# Altium PCB ESP32 with USBC.PcbDoc
Units mil, origin at the board's own origin, x right, y up, seen from the top; angles counter-clockwise.
Board outline 2700 x 1000 mil, 4 copper layers (L1, L2, L3, L4), stack 61.583 mil thick; 65 components, 77 nets, 323 pads, 159 vias.
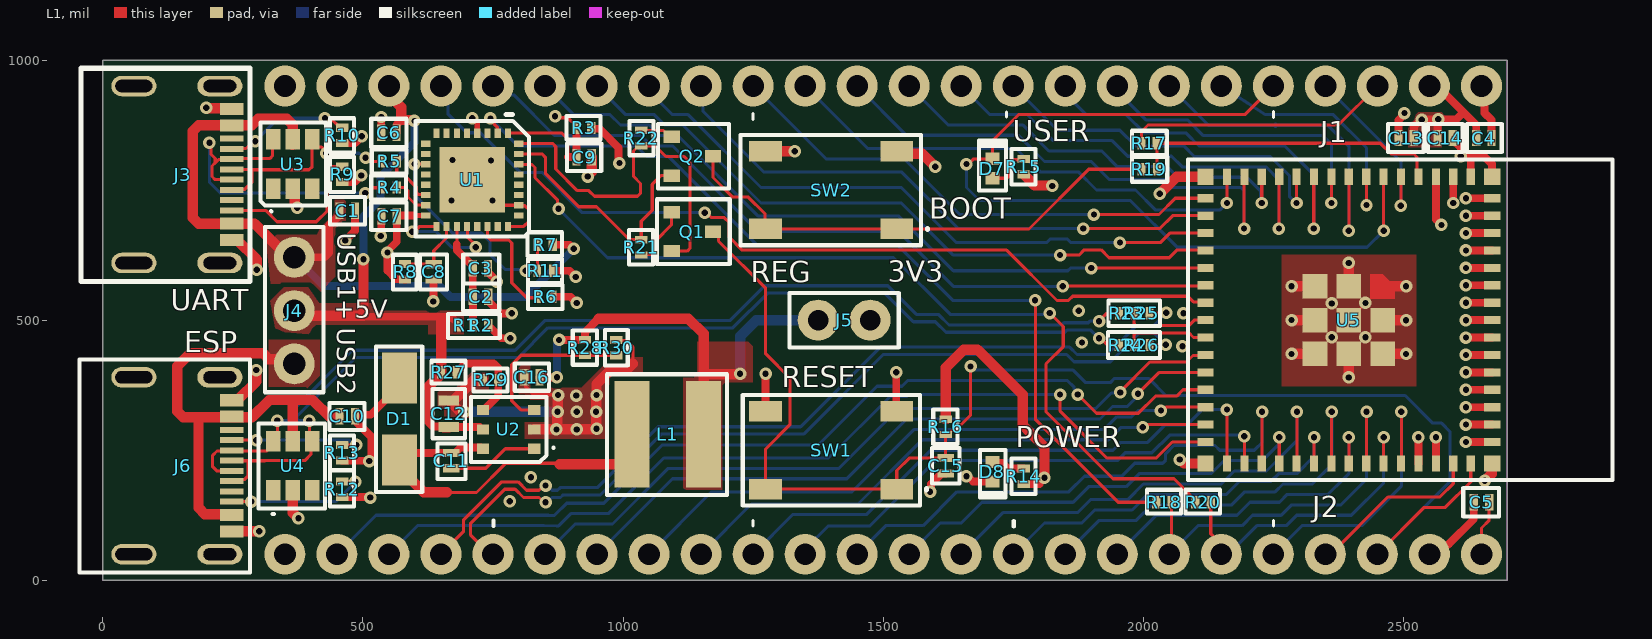
[diagram p0: L1 view]
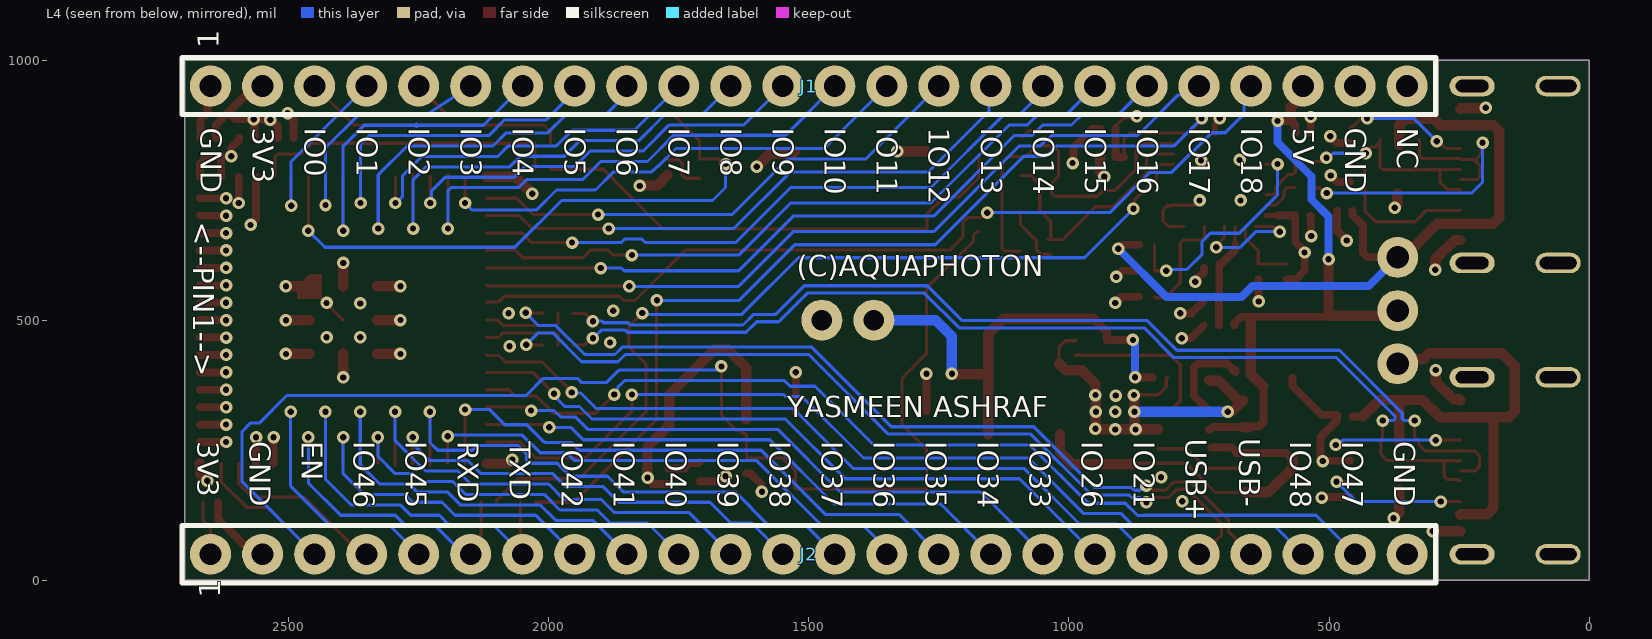
[diagram p1: L4 view, seen from below]
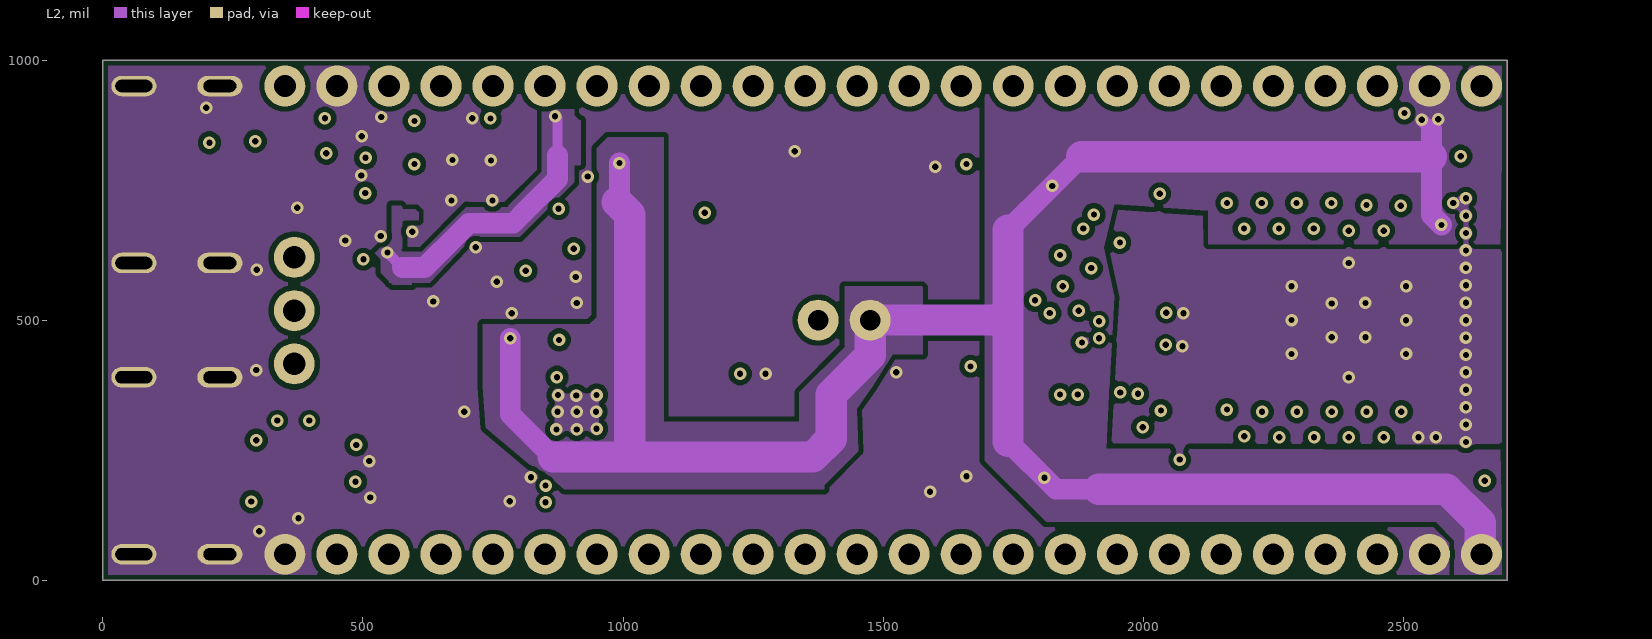
[diagram p2: L2]
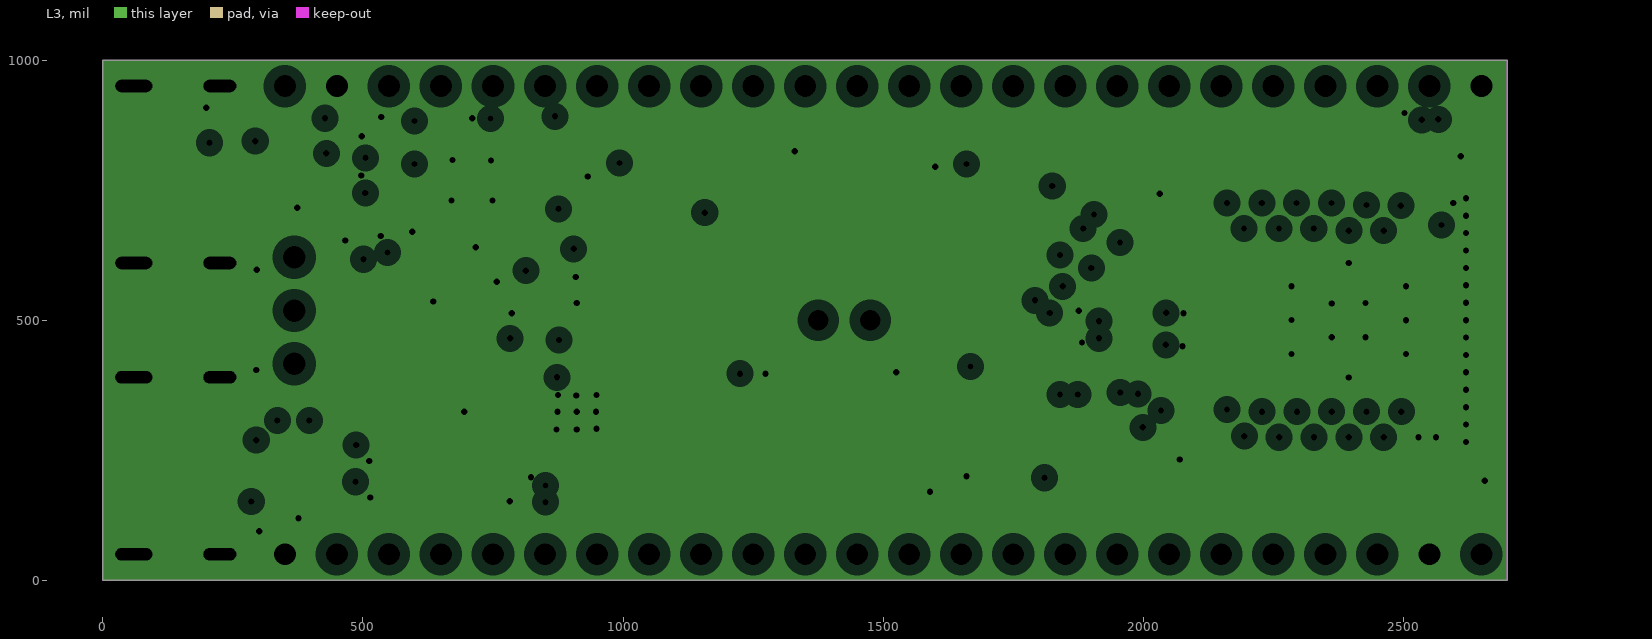
[diagram p3: L3, clearances drawn from the general rule]

## Layer stack, top to bottom
Top Solder: solder mask 0.4, Solder Resist, Dk 3.5
L1: signal copper 1.378
Dielectric 2: prepreg 3.9134, PP-006, Dk 4.1
L2: signal copper 0.5984
Dielectric 1: dielectric 49.8031, FR-4, Dk 4.8
L3: plane copper 0.5984, net GND
Dielectric 3: prepreg 3.9134, PP-006, Dk 4.1
L4: signal copper 1.378
Bottom Solder: solder mask 0.4, Solder Resist, Dk 3.5

## Board outline
0,0 0,1000 2700,1000 2700,0

## Design rules (kind name [scope] priority, off if disabled: settings)
Clearance SMALLER [(WithinRoom('FTDI')or WithinRoom('USBC1')or WithinRoom('USBC2'))And (Layer= 'L1')] p1: gap=6 ignorepadtopadclearanceinfootprint=FALSE
Clearance "DIFF90 Clearance" [InDifferentialPairClass('DIFF90')] p2: gap=6 ignorepadtopadclearanceinfootprint=FALSE
Clearance [All] p3: gap=8 ignorepadtopadclearanceinfootprint=FALSE
ComponentClearance R1R2 [InComponent('R1') vs InComponent('R2')] p1: gap=0 collisioncheckmode=3 verticalgap=0 showdistances=FALSE
ComponentClearance R24R26 [InComponent('R24') vs InComponent('R26')] p2: gap=0 collisioncheckmode=3 verticalgap=0 showdistances=FALSE
ComponentClearance R23R25 [InComponent('R23') vs InComponent('R25')] p3: gap=0 collisioncheckmode=3 verticalgap=0 showdistances=FALSE
ComponentClearance [All] p4: gap=10 collisioncheckmode=3 verticalgap=10 showdistances=FALSE
DiffPairsRouting DIFF90 [InDifferentialPairClass('DIFF90')] p1: maxlimit=8.1 minlimit=8 mostfreqgap=8 toplayer_minwidth=6.03 toplayer_maxwidth=6.23 toplayer_prefwidth=6.03 midlayer1_minwidth=5.1 midlayer1_maxwidth=5.2 midlayer1_prefwidth=5.1 bottomlayer_minwidth=6.03 bottomlayer_maxwidth=6.23 bottomlayer_prefwidth=6.03 maxuncoupledlength=500
MinimumSolderMaskSliver [All] p1: minsoldermaskwidth=2.95
PlaneClearance [All] p1: clearance=20
PlaneConnect [All] p1: pad.planeconnectstyle=Relief pad.reliefexpansion=20 pad.reliefentries=4 pad.reliefconductorwidth=20 pad.reliefairgap=10 via.planeconnectstyle=Direct via.reliefexpansion=20 via.reliefentries=4 via.reliefconductorwidth=10 via.reliefairgap=10
PolygonConnect [All] p1: connectstyle=Direct reliefconductorwidth=10 reliefentries=4 polygonreliefangle="90 Angle" airgapwidth=10
RoomDefinition USBC1 [False vs False] p1: confinementstyle=ConfineIn formatcopy=TRUE lockcomponents=FALSE outline 219,922 303,922 303,637 219,637
RoomDefinition USBC2 [False vs False] p2: confinementstyle=ConfineIn formatcopy=TRUE lockcomponents=FALSE outline 209,363 312,363 312,81 209,81
RoomDefinition FTDI [False vs False] p3: confinementstyle=ConfineIn formatcopy=TRUE lockcomponents=FALSE outline 606,872 813,872 813,668 606,668
RoutingVias [All] p1: holewidth=12 width=24 viastyle="Through Hole" minholewidth=12 minwidth=24 maxholewidth=12 maxwidth=24
SilkToSilkClearance [All] p1: silktosilkclearance=6
SilkToSolderMaskClearance [IsPad] p1: minsilkscreentomaskgap=5.91 clearancetoexposedcopper=TRUE
SolderMaskExpansion [All] p1: expansion=2 istentingtop=FALSE
SupplyNets "Schematic Supply Nets_5" [InNet('GND')] p1: voltage=0.000
SupplyNets "Schematic Supply Nets_4" [InNet('+5V_VBUS1')] p2: voltage=0.000
SupplyNets "Schematic Supply Nets_3" [InNet('+5V_VBUS2')] p3: voltage=0.000
SupplyNets "Schematic Supply Nets_2" [InNet('+5V')] p4: voltage=0.000
SupplyNets "Schematic Supply Nets_1" [InNet('+3V3_REG')] p5: voltage=0.000
SupplyNets "Schematic Supply Nets" [InNet('+3V3')] p6: voltage=0.000
Width [All] p1: maxlimit=100 minlimit=6 preferedwidth=10 minimp=50.000000 maximp=50.000000 favimp=50.000000
23 further rules are at their usual default settings.

## Classes and differential pairs
differential pair class DIFF90: CON2_USB CON_ESP_USB ESP_USB
differential pair FTDI_USB: +FTDI_USB_P -FTDI_USB_N
differential pair ESP_USB: +ESP_USB_P -ESP_USB_N
differential pair CON_ESP_USB: +CON_ESP_USB_P -CON_ESP_USB_N
differential pair CON2_USB: +CON2_USB_P -CON2_USB_N
differential pair CON1_USB: +CON1_USB_P -CON1_USB_N

## Components (designator, comment, footprint, x,y, rotation, side; value= is the part's Value field where it differs from the comment)
C1 "100nF, 50V" CAPACITOR 470,710 r180 top
C2 "4u7, 16V" CAPACITOR 726,544.76 r180 top
C3 "100nF, 50V" CAPACITOR 725.76,600 r180 top
C4 "100nF, 50V" CAPACITOR 2654.76,850 r180 top
C5 "100nF, 50V" CAPACITOR 2650,150 r0 top
C6 "100nF, 50V" CAPACITOR 550,860 r0 top
C7 "100nF, 50V" CAPACITOR 550.24,700 r0 top
C8 "100nF, 50V" CAPACITOR 636,592.76 r90 top
C9 "100nF, 50V" CAPACITOR 925.14,813.45 r180 top
C10 "100nF, 50V" CAPACITOR 470,315 r180 top
C11 "100nF, 50V" CAPACITOR 670,230 r270 top
C12 "10uF,25V" CL10A106MA8NRNC 665,320 r270 top
C13 "10uF, 10V" CAPACITOR 2505,850 r0 top
C14 "100nF, 50V" CAPACITOR 2580,850 r180 top
C15 "1uF, 35V" CAPACITOR 1620,220 r90 top
C16 "22uF, 6.3V" CAPACITOR 824.76,390 r0 top
D1 "B230A-13-F" "SCHOTTKY DIODE" 570,310 r270 top
D7 "RED LED" "RED LED" 1710,791.3 r270 top
D8 "GREEN LED" "GREEN LED" 1710,190 r90 top
J1 "X6511WV-24H-C60D30" HDR_1X24 2650,950 r90 bottom locked
J2 "X6511WV-24H-C60D30" HDR_1X24 2650,50 r90 bottom locked
J3 "USB-TYPE-C-018" USB-TYPE-C-018 225,950 r270 top
J4 "TSW-103-14-G-S" TSW-103-14-G-S 368,518.36 r270 top
J5 "22284020" HDR_1X2 1375,500 r90 top
J6 "USB-TYPE-C-018" USB-TYPE-C-018 225,390.16 r270 top
L1 "4.7uH" INDUCTOR 1086,281 r0 top
Q1 "SS8050-G" SS8050-G 1133,670 r270 top
Q2 "SS8050-G" SS8050-G 1133,815 r270 top
R1 "0R" RC0402 696.71,490 r0 top
R2 "0R" RC0402 726.24,490 r180 top
R3 "0R" RC0402 924.25,869.45 r180 top
R4 "27R" RC0402 550.24,755 r0 top
R5 "27R" RC0402 550.24,805 r0 top
R6 "10K" AC0402 850.24,545 r180 top
R7 "4K7" RC0402 850,645 r0 top
R8 "0R" RC0402 581,593 r90 top
R9 "5K1" RC0402 460,780 r90 top
R10 "5K1" RC0402 460,855 r90 top
R11 "10K" AC0402 850,595 r180 top
R12 "5K1" RC0402 460,175 r90 top
R13 "5K1" RC0402 460,245 r90 top
R14 "1K" RC0402 1770,200 r270 top
R15 "1K" RC0402 1770,795 r270 top
R16 "10K" AC0402 1620,295 r90 top
R17 "27R" RC0402 2011.24,840 r0 top
R18 "0R" RC0402 2039.76,150 r180 top
R19 "27R" RC0402 2011.47,790 r0 top
R20 "0R" RC0402 2114.76,150 r180 top
R21 "10K" AC0402 1035,640 r90 top
R22 "10K" AC0402 1035,850 r270 top
R23 "0R" RC0402 1967.76,513 r0 top
R24 "0R" RC0402 1967.47,452 r0 top
R25 "0R" RC0402 1997.29,513 r180 top
R26 "0R" RC0402 1997,452 r180 top
R27 "56K" RC0402 665,400 r180 top
R28 "31K6" AC0402 927,447.24 r90 top
R29 "10K2" RC0402 745.24,385 r0 top
R30 "10K2" RC0402 987,447.24 r270 top
SW1 "Tactile Switch" "TACTILE SWITCH" 1400,250 r180 top
SW2 "Tactile Switch" "TACTILE SWITCH" 1400,750 r180 top
U1 "FTDI FT232RNQ-REEL" "FTDI FT232RNQ-REEL" 710,770 r270 top
U2 "ADP2301AUJZ-R7" BUCK 780,290 r180 top
U3 "SRV05-4" SRV05-4 365,800 r90 top
U4 "SRV05-4" SRV05-4 365,220 r90 top
U5 "ESP32-S3-MINI-1-N8" ESP32-S3-MINI-1-N8 2395.03,500 r270 top

## Footprints (in the part's own frame and the unit in brackets; to place one, negate y for a bottom-side part, rotate by r counter-clockwise, add the part's x,y. Pads: shape width x height; smd on the part's side, far side on the other; paste and mask are expansions set on the pad)
AC0402 [mm] "Resistor"
  rect 0.36x0.6 smd: 1(-0.375,0) 2(0.375,0)
  silkscreen extent -0.84,-0.58 0.84,0.6, body extent -0.5,-0.25 0.5,0.25, height 0.37
BUCK [mm]
  rect 0.6x0.5 smd: 1(-1.25,0.95) 2(-1.25,0) 3(-1.25,-0.95) 4(1.25,-0.95) 5(1.25,0) 6(1.25,0.95)
  silkscreen extent -2.18,-1.57 1.83,1.6, body extent -1.4,-1.45 1.4,1.45, height 0.99
CAPACITOR [mm]
  rect 0.4x0.8 smd: 1(-0.375,0) 2(0.375,0)
  silkscreen extent -0.86,-0.69 0.84,0.66, body extent -0.5,-0.25 0.5,0.25, height 0.55
CL10A106MA8NRNC [mm]
  rect 0.5x1 smd: 1(-0.65,0) 2(0.65,0)
  silkscreen extent -1.22,-0.79 1.19,0.79, body extent -0.8,-0.4 0.8,0.4, height 0.9
ESP32-S3-MINI-1-N8 [mm] "ESP32-S3-MINI-1-N8"
  rect 0.8x0.4 smd: 0(-7,5.1) 0(-7,5.95) 3(-7,4.25) 4(-7,3.4) 5(-7,2.55) 6(-7,1.7) 7(-7,0.85) 8(-7,0) 9(-7,-0.85) 10(-7,-1.7) 11(-7,-2.55) 12(-7,-3.4) 13(-7,-4.25) 14(-7,-5.1) 15(-7,-5.95) 31(7,-5.95) 32(7,-5.1) 33(7,-4.25) 34(7,-3.4) 35(7,-2.55) 36(7,-1.7) 37(7,-0.85) 38(7,0) 39(7,0.85) 40(7,1.7) 41(7,2.55) 42(7,3.4) 43(7,4.25) 44(7,5.1) 45(7,5.95)
  rect 0.8x0.8 smd: 0(-7,7) 0(-7,-7) 0(7,7) 0(7,-7)
  rect 0.4x0.8 smd: 0(-5.95,7) 0(-5.1,7) 0(-4.25,7) 0(-3.4,7) 0(-2.55,7) 0(-1.7,7) 0(-0.85,7) 0(0,7) 0(0.85,7) 0(1.7,7) 0(2.55,7) 0(3.4,7) 0(4.25,7) 0(5.1,7) 0(5.95,7) 16(-5.95,-7) 17(-5.1,-7) 18(-4.25,-7) 19(-3.4,-7) 20(-2.55,-7) 21(-1.7,-7) 22(-0.85,-7) 23(0,-7) 24(0.85,-7) 25(1.7,-7) 26(2.55,-7) 27(3.4,-7) 28(4.25,-7) 29(5.1,-7) 30(5.95,-7)
  round 0.025 smd: 0(-1.65,1.65)
  rect 1.2x1.2 smd: 0(-1.65,0) 0(-1.65,-1.65) 0(0,1.65) 0(0,0) 0(0,-1.65) 0(1.65,1.65) 0(1.65,0) 0(1.65,-1.65)
  L1 region: -2.25,1.05 -2.25,1.65 -1.65,2.25 -1.05,2.25 -1.05,1.05
  silkscreen extent -7.85,-7.85 7.8,12.88, body extent -7.7,-7.73 7.7,12.78, height 2.55
"FTDI FT232RNQ-REEL" [mm] "FTDI FT232RNQ-REEL"
  rect 0.45x0.3 smd mask+0.046: 1(-2.27,1.75) 8(-2.27,-1.75)
  rect 0.45x0.3 smd: 2(-2.27,1.25) 3(-2.27,0.75) 4(-2.27,0.25) 5(-2.27,-0.25) 6(-2.27,-0.75) 7(-2.27,-1.25) 18(2.28,-1.25) 19(2.28,-0.75) 20(2.28,-0.25) 21(2.28,0.25) 22(2.28,0.75) 23(2.28,1.25)
  rect 0.3x0.45 smd mask+0.046: 9(-1.75,-2.27) 32(-1.75,2.27)
  rect 0.3x0.45 smd: 10(-1.25,-2.27) 11(-0.75,-2.27) 12(-0.25,-2.27) 13(0.25,-2.27) 14(0.75,-2.27) 15(1.25,-2.27) 26(1.25,2.27) 27(0.75,2.27) 28(0.25,2.27) 29(-0.25,2.27) 30(-0.75,2.27) 31(-1.25,2.27)
  rect 0.3x0.45 smd mask+0.048: 16(1.75,-2.27) 25(1.75,2.27)
  rect 0.45x0.3 smd mask+0.048: 17(2.28,-1.75) 24(2.28,1.75)
  rect 3.2x3.2 smd: 33(0,0)
  silkscreen extent -3.18,-2.77 2.77,2.77, body extent -2.5,-2.5 2.5,2.5, height 0.89
"GREEN LED" [mm]
  rect 0.6x0.7 smd: 1(0,0) 2(0.95,0)
  silkscreen extent -0.79,-0.64 1.52,0.61, body extent 0.01,-0.3 1.01,0.3, height 0.2
HDR_1X2 [mm]
  round 2 hole 1: 1(0,0) 2(0,-2.54)
  silkscreen extent -1.34,-3.94 1.33,1.4, body extent -1.24,-3.81 1.24,1.27, height 8.38
HDR_1X24 [mm]
  round 2 hole 1.06: 1(0,0) 2(0,-2.54) 3(0,-5.08) 4(0,-7.62) 5(0,-10.16) 6(0,-12.7) 7(0,-15.24) 8(0,-17.78) 9(0,-20.32) 10(0,-22.86) 11(0,-25.4) 12(0,-27.94) 13(0,-30.48) 14(0,-33.02) 15(0,-35.56) 16(0,-38.1) 17(0,-40.64) 18(0,-43.18) 19(0,-45.72) 20(0,-48.26) 21(0,-50.8) 22(0,-53.34) 23(0,-55.88) 24(0,-58.42)
  silkscreen extent -1.4,-59.82 1.4,1.4, body extent -1.27,-59.74 1.27,1.28, height 13.59
INDUCTOR [mm] "Inductor 0402"
  rect 1.7x5.2 smd: 1(-1.75,0) 2(1.75,0)
  silkscreen extent -2.97,-2.97 2.9,2.92, body extent -2.5,-2.5 2.5,2.5, height 2.2
RC0402 [mm] "Resistor"
  rect 0.4x0.6 smd: 1(-0.375,0) 2(0.375,0)
  silkscreen extent -0.85,-0.61 0.7,0.56, body extent -0.5,-0.25 0.5,0.25, height 0.4
"RED LED" [mm]
  rect 0.6x0.7 smd: 1(-0.475,0) 2(0.475,0)
  silkscreen extent -1.36,-0.66 1.07,0.66, body extent -0.5,-0.3 0.5,0.3, height 0.2
"SCHOTTKY DIODE" [mm]
  rect 2.5x1.7 smd: A(-2,0) K(2,0)
  silkscreen extent -3.53,-1.14 3.56,1.12, body extent -2.6,-1.3 2.6,1.3, height 2.4
SRV05-4 [mm]
  rect 1x0.7 smd: 1(-1.2,0.95) 2(-1.2,0) 3(-1.2,-0.95) 4(1.2,-0.95) 5(1.2,0) 6(1.2,0.95)
  silkscreen extent -2.32,-1.63 2.03,1.58, body extent -1.4,-1.45 1.4,1.45, height 1.45
SS8050-G [mm] "SS8050-G"
  rect 0.6x0.8 smd: 1(-0.947,-1.01) 2(0.947,-1.01) 3(-0.003,1.01)
  silkscreen extent -1.58,-1.73 1.57,1.83, body extent -1.45,-1.2 1.45,1.2, height 1.14
"TACTILE SWITCH" [mm] "Tactile Switch"
  rect 1.6x1 smd: 1(-3.2,1.9) 2(3.2,1.9) 3(-3.2,-1.9) 4(3.2,-1.9)
  silkscreen extent -4.65,-2.7 4.32,2.69, body extent -3.2,-2.55 3.2,2.55, height 1.6
TSW-103-14-G-S [mm] "TSW-103-14-G-S"
  round 2 hole 1.1: 1(-2.6,0) 2(0,0) 3(2.6,0)
  silkscreen extent -4.09,-1.42 3.99,1.42, body extent -3.94,-1.27 3.81,1.27, height 10.67
USB-TYPE-C-018 [mm] "USB-TYPE-C-018"
  rect 0.59x1.15 smd mask+0.064: A1B12(1.12,0.575) A4B9(1.92,0.575) B1A12(7.52,0.575) B4A9(6.72,0.575)
  rect 0.298x1.15 smd mask+0.064: A5(3.07,0.575) A6(4.07,0.575) A7(4.57,0.575) A8(5.57,0.575) B5(6.07,0.575) B6(5.07,0.575) B7(3.57,0.575) B8(2.57,0.575)
  oval 1x2.2 hole 0.6 slot 1.8 at 90 deg mask+0.064: S1(0,-4.2) S2(8.64,-4.2)
  oval 1x2.2 hole 0.6 slot 1.6 at 90 deg mask+0.064: S3(0,0) S4(8.64,0)
  silkscreen extent -0.86,-6.78 9.55,1.47, body extent -0.18,-6.42 8.76,0.33, height 3.24

## Part data
C1 C3 C4 C5 C6 C7 C8 C9 C10 C11 C14: library part CL05B104KB54PNC, "50V 100nF X7R ±10% 0402 Multilayer Ceramic Capacitors MLCC - SMD/SMT ROHS", Manufacturer=Samsung, Supplier Part Number=C307331, Manufacturer Part Number=CL05B104KB54PNC, Supplier=LCSC
C2: library part CL05A475MO5NUNC, "16V 4.7uF X5R ±20% 0402 Multilayer Ceramic Capacitors MLCC - SMD/SMT ROHS", Manufacturer="Samsung Electro-Mechanics", Manufacturer Part Number=CL05A475MO5NUNC, Supplier=LCSC, Supplier Name=C318563
C12: library part CL10A106MA8NRNC, "25V 10uF X5R ±20% 0603 Multilayer Ceramic Capacitors MLCC - SMD/SMT ROHS", Manufacturer="Samsung Electro-Mechanics", Supplier Part Number=C96446, Manufacturer Part Number=CL10A106MA8NRNC, Supplier=LCSC
C13: library part CL05A106MP8NUB8, "10V 10uF X5R ±20% 0402 Multilayer Ceramic Capacitors MLCC - SMD/SMT ROHS", Manufacturer=Samsung, Manufacturer Part Number=CL05A106MP8NUB8, Supplier=LCSC, Supplier Name=C307415
C15: library part CL05A105KL5NRNC, "35V 1uF X5R ±10% 0402 Multilayer Ceramic Capacitors MLCC - SMD/SMT ROHS", Manufacturer=Samsung, Supplier Part Number=C307413, Manufacturer Part Number=CL05A105KL5NRNC, Supplier=LCSC
C16: library part CL05A226MQ5QUNC, "6.3V 22uF X5R ±20% 0402 Multilayer Ceramic Capacitors MLCC - SMD/SMT ROHS", Manufacturer="Samsung Electro-Mechanics", Manufacturer Part Number=CL05A226MQ5QUNC, Supplier=LCSC, Supplier Name=C105226
D1: "30V 500mV@2A 2A SMA(DO-214AC) Schottky Diodes ROHS", Manufacturer="Diodes Incorporated", Supplier Part Number=C12889, Manufacturer Part Number=B230A-13-F, Supplier=LCSC
D7: library part VLMS1500-GS08, "20mA 54mcd -30℃~+85℃ 631nm Red 130° 75mW 2V 0402 LED Indication - Discrete ROHS", Manufacture Name="Vishay Intertech", Supplier Part Number=C511370, Manufacture Part Number=VLMS1500-GS08, Supplier=LCSC
D8: library part VLMG1500-GS08, "20mA 35mcd 571nm Yellow Green 130° 2V 0402 LED Indication - Discrete ROHS", Manufacture Name="Vishay Intertech", Supplier Part Number=C511404, Manufacture Part Number=VLMG1500-GS08, Supplier=LCSC
J1 J2: "Gold 250V 3A Policy 2.5mm 24P 260℃ -40℃~+105℃ 2.54mm Single Row Black Brass 2.54mm 1x24P Plugin,P=2.54mm Pin Headers ROHS", Manufacture Name="XKB Connection", Supplier Part Number=C725956, Manufacture Part Number=X6511WV-24H-C60D30, Supplier=LCSC
J3 J6: "3A 1 Horizontal attachment 16P Female -25℃~+85℃ Type-C SMD USB Connectors ROHS", Manufacture Name=DEALON, Supplier Part Number=C2927038, Manufacture Part Number=USB-TYPE-C-018, Supplier Name=LCSC
J4: "Gold Direct Insert 3P -55℃~+125℃ 2.54mm Black Single Row Phosphor Bronze Plugin,P=2.54mm Pin Headers ROHS", Manufacturer=Samtec, Supplier Part Number=C7365843, Manufacturer Part Number=TSW-103-14-G-S, Supplier=LCSC
J5: "Direct Insert Policy 2P 2.54mm Single Row Black Brass 1x2P Plugin,P=2.54mm Pin Headers ROHS", Manufacture Name=MOLEX, Supplier Part Number=C234182, Manufacture Part Number=22284020, Supplier=LCSC
L1: library part LQH5BPZ4R7NT0L, "2A 4.7uH ±30% 3A SMD,5x5mm Inductors (SMD) ROHS", Manufacturer="Murata Electronics", Manufacturer Part Number=LQH5BPZ4R7NT0L, Supplier=LCSC, Supplier Name=C703747
Q1 Q2: "25V 300mW 120@100mA,1V 1.5A NPN SOT-23 Bipolar (BJT) ROHS", Manufacture Name="Jiangsu Changjing Electronics Technology Co., Ltd.", Manufacture Part Number=SS8050-G(RANGE:120-200), Supplier Part Number=C164886, Supplier=LCSC
R1 R2 R3 R8 R18 R20 R23 R24 R25 R26: library part RC0402JR-070RL, "62.5mW Thick Film Resistors 50V ±5% 0Ω 0402 Chip Resistor - Surface Mount ROHS", Manufacturer=YAGEO, Supplier Part Number=C60485, Manufacturer Part Number=RC0402JR-070RL, Supplier=LCSC
R4 R5 R17 R19: library part RC0402FR-0727RL, "62.5mW Thick Film Resistors 50V ±100ppm/℃ ±1% 27Ω 0402 Chip Resistor - Surface Mount ROHS", Manufacturer=Yageo, Supplier Part Number=C138021, Manufacturer Part Number=RC0402FR-0727RL, Supplier=LCSC
R6 R11 R16 R21 R22: library part AC0402FR-0710KL, "62.5mW Thick Film Resistors 50V ±100ppm/℃ ±1% 10kΩ 0402 Chip Resistor - Surface Mount ROHS", Manufacturer=Yageo, Supplier Part Number=C144807, Manufacturer Part Number=AC0402FR-0710KL, Supplier=LCSC
R7: library part RC0402FR-074K7L, "62.5mW Thick Film Resistors 50V ±100ppm/℃ ±1% 4.7kΩ 0402 Chip Resistor - Surface Mount ROHS", Manufacturer=YAGEO, Manufacturer Part Number=RC0402FR-074K7L, Supplier=LCSC, Supplier Name=C105871
R9 R10 R12 R13: library part RC0402FR-075K1L, "62.5mW Thick Film Resistors 50V ±100ppm/℃ ±1% 5.1kΩ 0402 Chip Resistor - Surface Mount ROHS", Manufacturer=Yageo, Supplier Part Number=C105872, Manufacturer Part Number=RC0402FR-075K1L, Supplier=LCSC
R14 R15: library part RC0402FR-071KL, "62.5mW Thick Film Resistors 50V ±100ppm/℃ ±1% 1kΩ 0402 Chip Resistor - Surface Mount ROHS", Manufacturer=YAGEO, Supplier Part Number=C106235, Manufacturer Part Number=RC0402FR-071KL, Supplier=LCSC
R27: library part RC0402FR-0756KL, "62.5mW Thick Film Resistors 50V ±100ppm/℃ ±1% 56kΩ 0402 Chip Resistor - Surface Mount ROHS", Manufacturer=YAGEO, Supplier Part Number=C114756, Manufacturer Part Number=RC0402FR-0756KL, Supplier=LCSC
R28: library part AC0402FR-0731K6L, "62.5mW Thick Film Resistors 50V ±100ppm/℃ ±1% 31.6kΩ 0402 Chip Resistor - Surface Mount ROHS", Manufacturer=YAGEO, Supplier Part Number=C226989, Manufacturer Part Number=AC0402FR-0731K6L, Supplier=LCSC
R29 R30: library part RC0402FR-0710K2L, "62.5mW Thick Film Resistors 50V ±100ppm/℃ ±1% 10.2kΩ 0402 Chip Resistor - Surface Mount ROHS", Manufacturer=YAGEO, Supplier Part Number=C138069, Manufacturer Part Number=RC0402FR-0710K2L, Supplier=LCSC
SW1 SW2: "5.2mm 1.5mm Round Button 20mA Standing paste 5.2mm SPST 160gf 15V SMD,5.2x5.2mm Tactile Switches ROHS", Manufacture Name=C&K, Manufacture Part Number=PTS525SM15SMTR2LFS, Supplier Part Number=C221856, Supplier=LCSC
U1: "USB to UART QFN-32(5x5) USB Converters ROHS", Manufacturer=FTDI, Manufacturer Part Number=FT232RNQ-REEL, Supplier=LCSC, Supplier Name=C5441431
U2: "Step-down type Adjustable 800mV~17V 1.2A 3V~20V TSOT-6 DC-DC Converters ROHS", Manufacturer="Analog Devices", Supplier Part Number=C143872, Manufacturer Part Number=ADP2301AUJZ-R7, Supplier=LCSC
U3 U4: "15V 60W 9V 5V SOT-23-6 ESD and Surge Protection (TVS/ESD) ROHS", Manufacture Name=MSKSEMI, Supplier Part Number=C2836319, Manufacture Part Number=SRV05-4, Supplier=LCSC
U5: "SMD module, ESP32-S3FN8, 8 MB SPI flash, PCB antenna", Manufacturer="Espressif Systems", Supplier Part Number=C2913206, Manufacturer Part Number=ESP32-S3-MINI-1-N8, Supplier=LCSC

## Via types
v1: diameter 24, hole 12, L1 to L4, tented both sides, 159 vias

## Nets (pads, with @x,y where several pads share a name; then routed paths per layer and width w, separated by ;. In a path a pad name is that pad's centre, name@x,y a point inside that pad or via, vN(x,y) a via of type N, cw(c..) or ccw(c..) an arc to the next point about the centre after c; other vN are vias at no path point)
+3V3: C4.2 C5.2 C13.2 C14.2 J1.2 J2.1 J5.2 R2.1 R3.1 R14.2 R15.2 R16.2 U5.3 | length 5679.1
  L1 w6: J2.1 2650,100.51 2664.76,115.27 C5.2
  L1 w15: R2.1 766,465 v1(783,465) ; R3.1@939.02,867.82 954.94,867.82 991.28,831.48 991.28,803.72 v1(993,802) ; R14.2 1800.24,185.24 ; R15.2 1770,779.92 R15.2@1771.81,778.11 ; C13.2 2520.14,850.37 2520.14,871.71 2533.42,885 v1(2535.24,885) 2535.74,885.5 v1@2566.5,885.5 ; J1.2 2565,950 2615.5,899.5 ; U5.3 2562.35,693.65 v1(2573,683) ; C14.2 2565.61,850.37 2565.61,884.61 v1@2566.5,885.5 ; C4.2 2639.78,850.22 2639.78,875.22 2615.5,899.5 ; v1@2566.5,885.5 v1(2567,886) 2602,886 2615.5,899.5
  L1 w20: R16.2 1620,408.22 1654.78,443 1681.29,443 1768,356.29 1768,298.19 1810,256.19 v1(1810,197) ; R15.2@1772.13,778.11 1791.47,758.77 1824.23,758.77 v1(1825,758)
  L2 w10: v1@2566.5,885.5 v1(2567,886)
  L2 w25: v1(2535.24,885) 2553.82,866.43
  L2 w40: v1(783,465) 783,319.6 865.6,237 ; 989,727 993,731 v1(993,802) ; 1740,267 1832,175 1915,175 ; 1740,673 v1(1825,758) 1881,814 ; 2553.82,866.43 2553.82,814 2553.82,702.18 v1(2573,683)
  L2 w60: 865.6,237 1013,237 ; 989,727 1013,703 1013,237 ; 1740,267 1740,487 ; 1740,673 1740,487 ; 1881,814 2553.82,814 ; 1915,175 2583,175 2647.52,110.48 2647.52,52.48 J2.1 ; 1013,237 1364.85,237 1400,272.15 1400,357 1475,432 J5.2 1727,500 1740,487
"+3V3 FTDI": C7.2 C9.2 R3.2 R8.1 U1.1 U1.16 | length 1016
  L1 w6: U1.1 882.63,859.37 894.45,847.55 894.45,813.45 ; v1(869.41,891.78) 872.08,889.1 893.77,889.1 909.74,873.13 R3.2@910,873.13
  L1 w10.01: 598,701 598.1,701.1 U1.16
  L1 w15: R8.1 580.63,578.61 563.63,578.61 546.68,595.56 546.68,629.68 v1(547,630) 548.72,631.72 548.72,634.23 565,650.51 C7.2 565,700.63 565.37,701 598,701 ; 894.45,813.45 C9.2 910.37,864.63 909.86,865.14 R3.2@909.86,868.56
  L2 w20: v1(547,630) 576,601 ; v1(869.41,891.78) 874,887.18 874,817
  L2 w40: 576,601 618.6,601 685.6,668 703.8,686.2 788.8,686.2 813,710.4 874,771.4 874,817
+3V3_REG: C16.2 J5.1 L1.2 R28.2 | length 921.3
  L1 w15: C16.2 v1(873,390) ; v1(877,462) R28.2 927,477.21 952.79,503
  L1 w20: 952.79,503 1125.75,503 1154.9,473.85 1154.9,396.23 ; L1.2 1154.9,396.23 ; v1(1225,397) 1224.23,396.23 1154.9,396.23
  L4 w15: v1(873,390) 873,455.56 877,459.56 v1(877,462)
  L4 w20: v1(1225,397) 1225,469.28 1255.72,500 J5.1
+5V: C6.2 C12.2 J1.22 J4.2 R1.1 R27.2 U2.5 | length 1199.3
  L1 w15: 503,506.5 669.38,506.5 681.94,493.94 R1.1 ; J1.22@550,933.18 J1.22 ; C6.2 565.14,860.37 565.14,875.94 573.84,884.64 573.92,884.72 ; v1@597.28,884.72 v1(599,883) ; 626,371.83 626,304.33 634.79,295.54 663.87,295.54 C12.2 724.41,294.41 728.82,290 U2.5
  L1 w20: J4.2 377.86,508.5 501,508.5 v1(501,617) ; J1.22@550,933.18 573.84,909.34 573.84,884.64 ; 573.92,884.72 v1@597.28,884.72 ; 626,371.83 650.24,396.06 R27.2 650.24,503.26 ; C12.2@655.16,294.41 C12.2
  L4 w15: v1(501,617) 501,699.03 534.01,732.05 534.01,776.73 599,841.72 v1(599,883)
+5V_VBUS1: C1.2 J3.A4B9 J3.B4A9 J4.1 R7.2 U3.5 | length 1446.6
  L1 w15: J4.1 426.1,620.72 434.89,629.51 434.89,681.78 455.24,702.13 C1.2 ; R7.2 897,645 v1(905,637)
  L1 w20: U3.5@365,837.24 U3.5 365,875.28 353.28,887 298.96,887 286.37,874.41 J3.A4B9 184.72,874.41 173,862.69 173,697.15 184.72,685.43 J3.B4A9 291.57,685.43 356.28,620.72 J4.1
  L4 w15: J4.1@368.55,620.72 423.77,565.5 647.22,565.5 668.29,544.43 812.43,544.43 v1(905,637)
+5V_VBUS2: C10.2 J4.3 J6.A4B9 J6.B4A9 U4.5 | length 997.3
  L1 w15: 435,315 C10.2
  L1 w20: J6.B4A9 246.02,127.2 195.72,127.2 184,138.92 184,312.95 ; U4.5@365.47,267.72 365.47,346.39 ; J4.3 358.82,425.18 319.08,425.18 308.25,436 167.72,436 143,411.28 143,324.67 154.72,312.95 184,312.95 ; 435,315 403.61,346.39 365.47,346.39 ; 184,312.95 199.07,312.95 246.02,312.95 J6.A4B9 249.25,312.95 286.76,312.95 320.2,346.39 365.47,346.39
"+VCC FTDI": C2.2 C3.2 R1.2 R2.2 U1.19 | length 205.4
  L1 w6: 680.23,645.54 680.71,646.02 680.71,668 U1.19@680.71,680
  L1 w15: 680.23,645.54 680.23,634.86 706.85,608.25 710.63,608.25 711,607.87 C3.2 711.12,599.88 711.12,544.88 C2.2 711.35,544.65 711.35,490.12 R2.2
"BTN GPIO0": Q2.3 R19.1 SW2.1 SW2.2 | length 969.7
  L1 w6: Q2.3 1172.76,774.24 1210,737 1240,737 1272.98,704.02 1272.98,676.24 SW2.2 SW2.1 1780.38,675.2 1895.18,790 R19.1
"CHIP PU": C15.2 J2.3 Q1.3 R16.1 SW1.1 SW1.2 U5.45 | length 2717.5
  L1 w6: Q1.3 1176.7,670.12 1183.51,663.31 1183.51,651.74 1274.02,561.23 1274.02,435.17 1320.51,388.67 1320.51,298.9 1274.02,252.41 SW1.2 SW1.1 1525.98,210.98 1549.76,234.76 C15.2 R16.1 1622.09,282.32 1626.81,282.32 1632.17,287.68 1638.02,287.68 1668.04,317.69 v1(1668.04,411) ; J2.3 2540,140 2580.4,140 2629.28,188.88 U5.45
  L4 w6: v1(1668.04,411) 1671.82,411 1678.82,404 1865.18,404 1889.22,379.96 1936.52,379.96 1944.53,387.97 2010.24,387.97 2043.21,355 2503.21,355 2556.22,301.98 2573.41,301.98 2589.35,286.04 2589.35,189.35 J2.3
CON1_USB_N: J3.A7 J3.B7 R4.1 U3.6 | length 679.2
  L1 w6: v1(205,841) 207.68,838.32 207.68,819.19 216.2,810.67 216.2,802.38 ; J3.A7 215.92,770.08 210,776 210,796.19 216.2,802.38 ; U3.6 326.42,846.06 326.42,816.35 320.56,810.49 270.11,810.49 269.94,810.32 248.5,810.32 J3.B7 246.77,808.58 222.4,808.58 216.2,802.38 ; v1(504.51,744.27) 508.3,744.27 518.46,754.42 534.89,754.42 R4.1
  L4 w6: v1(205,841) 205,765 225.73,744.27 v1(504.51,744.27)
CON1_USB_P: J3.A6 J3.B6 R5.1 U3.4 | length 429.2
  L1 w6: J3.B6 248.5,751.26 272.88,751.26 287.05,765.43 287.05,788.95 396.44,788.95 402.3,794.81 U3.4@402.3,841.34 ; J3.A6 287.05,789.76 ; U3.4 402.4,841.34 411.18,832.56 420.58,832.56 429.53,823.6 v1(429.53,820.7) ; v1(505,812) 505,810.86 510.86,805 R5.1
  L4 w6: v1(429.53,820.7) 492.51,820.7 501.21,812 v1(505,812)
CON2_USB_N: J6.A7 J6.B7 R23.1 U4.6 | length 2009
  L1 w6.03: J6.A7 218.76,210.24 211,218 211,240.06 219.49,248.54 246.57,248.54 J6.B7 248.97,248.28 314.54,248.28 327.6,261.34 U4.6 335.47,275.12 v1(335.47,307) ; v1(1915,498) 1930,513 R23.1
  L4 w6.03: v1(335.47,307) 355.69,307 359.22,310.53 359.22,321.34 479.87,441.98 792.53,441.98 849.59,499.05 1205.2,499.05 1272.19,566.03 1508.81,566.03 1563.84,511 1606.07,511 1626.42,490.65 1843.12,490.65 1847.35,494.88 1894.03,494.88 1897.23,498.07 1914.93,498.07 v1(1915,498)
CON2_USB_P: J6.A6 J6.B6 R24.1 U4.4 | length 2069.5
  L1 w6.03: J6.B6 250.49,193.4 272.06,193.4 279.29,200.64 279.29,229.92 ; J6.A6 250.49,229.92 272.06,229.78 ; J6.A6@247.78,229.78 272.06,229.78 ; v1(397,307) 397,272.65 U4.4 400.28,265.13 400.28,242.05 388.17,229.94 312,229.84 279.29,229.79 272.06,229.78 ; v1(1915,465.06) 1918.64,465.06 1931.7,452 R24.1
  L4 w6.03: v1(397,307) 376.78,307 373.25,310.53 373.25,315.53 485.68,427.95 798.34,427.95 855.4,485.02 1211.01,485.02 1278,552 1503,552 1558.03,496.97 1600.26,496.97 1620.61,476.62 1848.93,476.62 1853.16,480.85 1899.21,480.85 1911.94,468.12 1911.94,465.06 v1(1915,465.06)
"CON GPIO0": J1.3 R17.1 | length 512.3
  L1 w6: R17.1 1996.47,862.47 2009,875 2375,875 J1.3
CON_ESP_USB_N: J2.21 R25.1 | length 1664
  L1 w6.03: J2.21 693,93 693,115.39 766.66,189.05 798.34,189.05 814.37,173.02 838.48,173.02 847.47,182 v1(851,182) ; R25.1 2013.06,514 v1(2044,514)
  L4 w6.03: v1(851,182) 854.53,182 863.52,173.02 873.96,173.02 878.99,178.05 950.7,178.05 1067.66,295 1341.26,295 1494.3,448.05 1858.41,448.05 1872.47,433.98 1930.99,433.98 1986.49,489.49 2019.49,489.49 v1(2044,514)
CON_ESP_USB_P: J2.20 R26.1 | length 1641.6
  L1 w6.03: J2.20 743.8,50 707.03,86.77 707.03,109.58 772.47,175.02 792.53,175.02 808.56,158.98 838.48,158.98 847.47,150 v1(851,150) ; R26.1@2012.26,452.5 v1(2043.21,452.5)
  L4 w6.03: v1(851,150) 854.53,150 863.52,158.98 879.77,158.98 884.8,164.02 956.51,164.02 1073.47,280.97 1347.07,280.97 1500.11,434.02 1852.6,434.02 1866.66,419.95 1936.8,419.95 1992.3,475.46 2020.25,475.46 v1(2043.21,452.5)
"DTR FTDI": Q2.2 R21.2 U1.31 | length 485.8
  L1 w6: U1.31 844.75,819.21 850.61,813.35 850.61,782.2 914.81,718 949,718 1012.24,654.76 R21.2@1039.72,654.76 ; R21.2 1035,690 1056,711 1056,761 1072.72,777.72 Q2.2
ESP_USB_N: R23.2 R25.2 U5.23 | length 162.9
  L1 w6.03: R23.2 1982.38,512.85 1982.38,493.05 1985.91,489.52 2018.75,489.52 ; 2018.78,489.55 2087.55,489.55 2098,500 U5.23
ESP_USB_P: R24.2 R26.2 U5.24 | length 162.3
  L1 w6.03: R26.2 1982.38,452.15 1982.38,471.95 1985.91,475.48 2024.56,475.48 ; 2024.59,475.52 2087.49,475.52 2096.46,466.54 U5.24
"FTDI RESET": C8.2 R8.2 U1.18 | length 137.6
  L1 w6: R8.2@581.24,607.53 C8.2 ; C8.2@636.12,607.65 636.12,633.25 660.66,657.79 660.66,668 660.66,680.1 U1.18
FTDI_USB_N: R4.2 U1.15 | length 76.9
  L1 w6.03: R4.2 580.42,755 586.73,748.69 586.73,736.56 602.03,721.26 606,721.26 620.16,721.26 U1.15
FTDI_USB_P: R5.2 U1.14 | length 100.4
  L1 w6.03: R5.2 565,784.43 569.61,779.83 578.26,779.83 602.76,755.33 602.76,745.16 606,741.92 606.29,741.63 619.48,741.63 U1.14
GND: C1.1 C2.1 C3.1 C4.1 C5.1 C6.1 C7.1 C8.1 C9.1 C10.1 C12.1 C13.1 C14.1 C15.1 C16.1 D1.A D8.1 J1.1 J1.23 J2.2 J2.24 J3.A1B12 J3.B1A12 J3.S1 J3.S2 J3.S3 J3.S4 J6.A1B12 J6.B1A12 J6.S1 J6.S2 J6.S3 J6.S4 R6.1 R9.1 R10.1 R11.1 R12.1 R13.1 R29.1 R30.1 SW1.3 SW1.4 SW2.3 SW2.4 U1.4 U1.17 U1.20 U1.24 U1.26 U1.33 U2.2 U3.2 U4.2 U5.0 U5.42 U5.43 | length 4800
  L1 w6: v1(595,670) 598.79,670 609.02,680.24 U1.17 ; U1.20 701.01,679.38 701.01,659.56 716.91,643.67 v1(716.91,639.91) ; v1(749,730) 758.21,720.79 U1.26 800.28,719.88 810.91,719.88 819.23,711.56 819.23,690.64 808.82,680.24 U1.24 ; C16.1 812.87,387.13 812.87,371.82 828.1,356.59 v1@875,356.59 ; R30.1 988.65,460.35 1007.1,460.35 1018.81,448.63 1018.81,416.31 ; U5.0@2395.03,500 2427,531.97 v1(2427,533)
  L1 w10.01: v1(710,888) 719.84,878.16 U1.4
  L1 w15: R12.1 460.37,159.86 513.14,159.86 v1(514,159) ; R13.1 460.37,229.86 511.14,229.86 v1(512,229) 512,231.44 516.5,235.94 516.5,275.39 484.76,307.13 C10.1 484.76,317.76 485.14,318.13 515.14,318.13 570,372.99 D1.A ; R9.1 483.76,765.24 v1(496.65,778.13) ; R10.1 484.76,840.24 v1(497.82,853.29) ; v1(466,653) 484.76,671.76 C1.1 ; v1(534.32,661.55) 535.1,662.32 535.1,699.63 C7.1 ; C6.1 v1(535.24,890.43) ; v1(635,536) 635.5,536.5 635.5,577.63 635.87,578 C8.1 ; C3.1 740.53,592.13 757.2,575.46 v1(757.2,573.93) ; C2.1 740.76,536.89 764.65,513 v1(786,513) ; R11.1 897,595 v1(909,583) ; R6.1 899,545 v1(911,533) ; SW1.4 v1(1274.02,396.98) ; v1(1525,400) 1525,325.79 SW1.3 ; v1(1590,170) 1591.72,171.72 1591.72,184.83 1612.13,205.24 C15.1 ; v1(1660,200) 1662.44,200 1672.44,190 D8.1 ; C13.1 2490.61,850.37 2490.61,884.17 2502,895.56 v1(2502,898) ; U5.42 v1(2528.89,274.86) ; J2.2 2567.25,50 2587.16,69.91 2587.59,69.91 2635.24,117.56 C5.1 ; U5.43 v1(2562.35,274.86) ; C14.1 2594.76,846.38 2610,831.14 v1(2610,815) 2632.5,815 ; v1(2595.82,725.14) U5.0@2595.82,775.59 ; v1(2620.17,265.75) U5.0@2670.62,265.75 ; v1(2620.17,299.21) U5.0@2670.62,299.21 ; v1(2620.17,332.68) U5.0@2670.62,332.68 ; v1(2620.17,366.14) U5.0@2670.62,366.14 ; v1(2620.17,399.61) U5.0@2670.62,399.61 ; v1(2620.17,433.07) U5.0@2670.62,433.07 ; v1(2620.17,466.54) U5.0@2670.62,466.54 ; v1(2620.17,500) U5.0@2670.62,500 ; v1(2620.17,533.46) U5.0@2670.62,533.46 ; v1(2620.17,566.93) U5.0@2670.62,566.93 ; v1(2620.17,600.39) U5.0@2670.62,600.39 ; v1(2620.17,633.86) U5.0@2670.62,633.86 ; v1(2620.17,667.32) U5.0@2670.62,667.32 ; v1(2620.17,700.79) U5.0@2670.62,700.79 ; v1(2620.17,734.25) U5.0@2670.62,734.25 ; U5.0@2629.28,775.59 2629.28,811.78 2632.5,815 ; J1.1 2655.78,944.22 2655.78,898.28 2669.53,884.53 C4.1 ; U5.0@2670.62,775.59 2670,776.21 2670,800 2655,815 2632.5,815
  L1 w20: v1(199,908) 199.77,907.23 246.31,907.23 J3.A1B12 ; J6.B1A12 v1(300.91,94.09) v1@301,94 ; J6.A1B12 249.25,347.68 260.68,347.68 295,382 v1(295,404) ; J3.B1A12 258.66,653.94 296,616.6 v1(296,597) ; U4.2 365,130 v1(376,119) ; U3.2@368.62,743.07 368.62,722.46 373.81,717.27 v1(373.81,716.19) ; v1(694.56,323.91) 693.8,324.67 685.92,324.67 C12.1 674.53,345.59 712.13,383.19 728.66,383.19 R29.1 ; U2.2 v1(872,290) ; v1(875,356) 874.5,355.5 874.5,324.5 v1(874,324) 873.23,323.23 873.23,292.32 872,291.08 v1(872,290) ; v1(932,776) 932,777.08 939.9,784.98 C9.1 ; v1(949,356) 948.5,355.5 948.5,324.5 v1(948,324) 948.5,323.5 948.5,291.5 v1(949,291) 948.5,290.5 911.5,290.5 v1(911,290) v1(872,290) ; v1@949,357.08 949,377.28 975.08,403.36 1005.86,403.36 1018.81,416.31 ; SW2.4 v1(1329.8,824.8) v1@1330,825 ; SW2.3 1530.68,820.11 1574.89,820.11 v1(1600,795) ; v1(2031.53,743) 2064.12,775.59 U5.0@2119.44,775.59 ; v1(2070,232) 2071.08,232 2078.67,224.41 U5.0@2119.44,224.41 ; v1(2285,565) v1(2285,565) U5.0@2330.07,564.96 ; v1@2285.04,435.04 U5.0@2330.07,435.04 ; v1(2285,500.04) U5.0@2330.07,500 ; v1(2394.99,389.97) U5.0@2395.03,435.04 ; U5.0@2395.03,564.96 v1@2395.03,609.99 ; U5.0@2459.99,435.04 v1@2505.02,435.04 ; U5.0@2459.99,500 v1@2505.02,500 ; U5.0@2459.99,564.96 v1@2505.02,564.96 ; v1(2656.28,191.28) 2670,205 2670,223.79 U5.0@2670.62,224.41
  L4 w6: v1(595,670) 640.91,670 671,639.91 v1(716.91,639.91)
  L4 w20: v1(694.56,323.91) 694.61,323.95 v1(874,324) v1(874,324)
  other v1: 782,152 823,198 911,324 910,355 2285,435.08 2505.06,435 2075.1,449.91 1882,457 2362,467 2427,467 2505.06,499.96 2077,513 1876,518 2362,532 2505.06,564.92 2395.07,610.03 670,730 746,807 672,808
GPIO0: R17.2 R19.2 U5.4 | length 600.1
  L1 w6: R19.2 2026.12,790.12 2026.12,839.88 R17.2 2455.4,840 2476.15,819.25 2505.68,819.25 2520.16,819.25 2526.01,813.39 2526.01,778.46 U5.4
GPIO1: J1.4 U5.5 | length 345.8
  L1 w6: v1(2495,720) 2495.42,720.42 U5.5
  L4 w6: J1.4 2495,805 v1(2495,720)
GPIO2: D7.1 J1.5 U5.6 | length 1684.1
  L1 w6: v1(1660,800) 1663.79,800 1673.79,810 D7.1 1710,845 1760,895 2195,895 J1.5 ; v1@2461.96,672.03 U5.6
  L4 w6: v1(1660,800) 1660,755 1685,730 1975,730 2065,640 2429.93,640 v1(2461.93,672)
GPIO3: J1.6 U5.7 | length 489.9
  L1 w6: U5.7@2428.49,767.72 U5.7 ; v1(2429,721.2) U5.7@2429,771.65
  L4 w6: J1.6 2234.9,895 2365,895 2429,831 v1(2429,721.2)
GPIO4: J1.7 U5.8 | length 658.8
  L1 w6: v1(2395,672) U5.8
  L4 w6: J1.7 2125.41,874.59 2253.98,874.59 2354.58,874.59 2395,834.17 v1(2395,672)
GPIO5: J1.8 U5.9 | length 627.4
  L1 w6: v1(2361.57,725.14) U5.9
  L4 w6: J1.8 1950,940 2005,885 2085,885 2115.41,854.59 2345.41,854.59 2361.57,838.43 v1(2361.57,725.14)
GPIO6: J1.9 U5.10 | length 763.9
  L1 w6: v1@2327.6,675.97 U5.10@2327.6,779.53
  L4 w6: J1.9 1850,935 1890,895 1966.72,895 2001.72,860 2081.72,860 2107.13,834.59 2272.12,834.59 2327.57,779.14 v1(2327.57,675.94)
GPIO7: J1.10 U5.11 | length 711.6
  L1 w6: v1(2294.64,725.14) U5.11
  L4 w6: J1.10 1835,865 1955,865 1985,835 2077.55,835 2097.96,814.59 2243.99,814.59 2280.64,777.94 2280.64,738 2293.49,725.14 v1(2294.64,725.14)
GPIO8: J1.11 U5.12 | length 882.7
  L1 w6: v1@2260.67,675.97 U5.12@2260.67,779.53
  L4 w6: J1.11 1704.64,895.36 1776.36,895.36 1826.72,845 1940,845 1970,815 2054.28,815 2074.7,794.59 2235.71,794.59 2260.64,769.66 v1(2260.64,675.94)
GPIO9: J1.12 U5.13 | length 833.5
  L1 w6: v1(2227.71,725.14) U5.13
  L4 w6: J1.12 1624.64,875.36 1768.07,875.36 1818.43,825 1920,825 1950,795 2046,795 2066.41,774.59 2199.14,774.59 2225.03,748.7 2225.03,727.82 v1(2227.71,725.14)
GPIO10: J1.13 U5.14 | length 1003.5
  L1 w6: v1@2193.74,675.97 U5.14@2193.74,779.53
  L4 w6: J1.13 1544.64,855.36 1759.79,855.36 1810.15,805 1900,805 1935,770 2042.72,770 2058.13,754.59 2187.85,754.59 2193.71,748.73 v1(2193.71,675.94)
GPIO11: J1.14 U5.15 | length 965.3
  L1 w6: v1(2160.78,725.14) U5.15
  L4 w6: J1.14 1470,830 1755.36,830 1790.36,795 1791.86,795 1801.86,785 1875,785 1910,750 1985,750 2023,712 2147.64,712 v1(2160.78,725.14)
GPIO12: J1.15 U5.16 | length 984.7
  L1 w6: v1(1905,703) 2030.24,703 2061.49,734.25 U5.16
  L4 w6: J1.15 1390,810 1540,810 1647,703 v1(1905,703)
GPIO13: J1.16 U5.17 | length 1119.6
  L1 w6: v1(1884.34,676) 2031.52,676 2056.31,700.79 U5.17
  L4 w6: J1.16 1153.51,946.49 1153.51,901.49 1270,785 1535,785 1644,676 v1(1884.34,676)
GPIO14: J1.17 U5.18 | length 1213.4
  L1 w6: v1(1955,649) 2032.8,649 2051.13,667.32 U5.18
  L4 w6: J1.17 1050,940 1095,895 1125,895 1265,755 1535,755 1641,649 1814,649 1821,656 1854,656 1861,649 v1(1955,649)
GPIO15: J1.18 U5.19 | length 1321.1
  L1 w6: v1(1840,625) 1876.38,625 1886.38,635 1918.97,635 1933.97,620 2050,620 2065,635 2118.3,635 U5.19
  L4 w6: J1.18 1005,895 1060,895 1080,875 1115,875 1265,725 1535,725 1635,625 v1(1840,625)
GPIO16: J1.19 U5.20 | length 1418.2
  L1 w6: v1(1900,600) U5.20@2119.05,600
  L4 w6: J1.19 905,895 975,895 995,875 1050,875 1070,855 1105,855 1260,700 1530,700 1635,595 1855,595 1860,600 v1(1900,600)
GPIO17: J1.20 U5.21 | length 1529.7
  L1 w6: v1(1845,565) 1845.96,565.96 2118.47,565.96 U5.21
  L4 w6: J1.20 768.6,950 785.55,933.05 789.95,933.05 868,855 1033.28,855 1042.28,846 1044,846 1055,835 1095,835 1260,670 1530,670 1635,565 v1(1845,565)
GPIO18: J1.21 U5.22 | length 1688.9
  L1 w6: v1(1157,706.53) 1160.25,706.53 1169.86,696.93 1194.73,696.93 1203.51,688.14 1203.51,660.02 1229.03,634.5 1737.32,634.5 1834.21,537.61 1855.79,537.61 1864.15,545.96 2085.22,545.96 2096.16,535.02 2117.88,535.02 U5.22
  L4 w6: J1.21 663.15,936.85 663.15,896.66 699.64,860.17 725.83,860.17 802.07,783.93 813,783.93 844.26,783.93 921.65,706.53 v1(1157,706.53)
GPIO21: J2.19 U5.25 | length 1429.1
  L1 w6: v1(1955.72,360.97) 1955.72,362.67 2012.66,419.61 2082.98,419.61 2095.53,432.15 2118.52,432.15 U5.25
  L4 w6: J2.19 908,108 979.72,108 1086.72,215 1415,215 1530,330 1908.58,330 1938.54,359.96 1954.71,359.96 v1(1955.72,360.97)
GPIO26: J2.18 U5.26 | length 1316.5
  L1 w6: v1(1989.62,358.38) 2030.84,399.61 U5.26
  L4 w6: J2.18 1095,195 1430,195 1545,310 1916.86,310 1940.83,333.97 1969.11,333.97 1982.62,347.47 1982.62,347.59 1989.62,354.59 v1(1989.62,358.38)
GPIO33: J2.17 U5.28 | length 1186.5
  L1 w6: v1(2033.81,326.21) 2037.6,326.21 2044.07,332.68 U5.28
  L4 w6: J2.17 1170,170 1440,170 1560,290 1925.15,290 1949.11,313.97 1977.4,313.97 1989.64,326.21 v1(2033.81,326.21)
GPIO34: J2.16 U5.29 | length 1072.7
  L1 w6: v1(1999.03,293.97) 2002.82,293.97 2008.07,299.21 U5.29
  L4 w6: J2.16 1246.64,146.64 1451.64,146.64 1575,270 1933.43,270 1957.4,293.97 v1(1999.03,293.97)
GPIO35: J2.15 U5.31 | length 1129.6
  L1 w6: U5.31 v1(2160.81,328)
  L4 w6: J2.15 1326.64,126.64 1468.36,126.64 1591.72,250 1941.72,250 1956.72,265 2008.25,265 2042.25,299 2084.36,299 2113.36,328 v1(2160.81,328)
GPIO36: J2.14 U5.32 | length 998.4
  L1 w6: U5.32 v1(2194.24,277)
  L4 w6: J2.14 1350,60 1394.37,104.37 1474.37,104.37 1600,230 1950,230 1965,245 2016.53,245 2050.53,279 2061,279 2192.24,279 v1(2194.24,277)
GPIO37: J2.13 U5.33 | length 1044.4
  L1 w6: U5.33@2228.21,220.47 v1@2228.21,324.03
  L4 w6: J2.13 1505,105 1576.72,105 1641.72,170 1856.86,170 1886.86,200 1958.58,200 1983.58,225 2037.14,225 2043,230.86 2043,243.18 2058.82,259 2137.72,259 2146.72,250 2213.38,250 2216.31,252.93 2228.24,264.86 v1@2228.24,323.7
  other v1: 2228.24,324.06
GPIO38: J2.12 U5.34 | length 861.9
  L1 w6: U5.34 v1(2261.17,274.86)
  L4 w6: J2.12 1610,110 1650,110 1690,150 1865.15,150 1895.15,180 1966.86,180 1991.86,205 2130,205 2155,230 2228.58,230 2261.17,262.59 v1(2261.17,274.86)
GPIO39: J2.11 U5.35 | length 895
  L1 w6: U5.35@2295.14,220.47 v1@2295.14,324.03
  L4 w6: J2.11 1730,130 1873.43,130 1898.43,155 1970.15,155 2000.15,185 2150,185 2175,210 2236.86,210 2295.17,268.31 v1(2295.17,324.06)
GPIO40: J2.10 U5.36 | length 743.2
  L1 w6: U5.36 v1(2328.1,274.86)
  L4 w6: J2.10 1810,110 1881.72,110 1906.72,135 1978.43,135 2008.43,165 2160,165 2185,190 2245.15,190 2260.15,205 2295,205 2328.1,238.1 v1(2328.1,274.86)
GPIO41: J2.9 U5.37 | length 789
  L1 w6: U5.37@2362.07,220.47 v1@2362.07,324.03
  L4 w6: J2.9 1915,115 1986.72,115 2016.72,145 2170,145 2195,170 2253.43,170 2268.43,185 2325,185 2362.1,222.1 2362.1,259.23 v1(2362.1,324.06)
GPIO42: J2.8 U5.38 | length 629.5
  L1 w6: U5.38 v1(2395.03,274.86)
  L4 w6: J2.8 2025,125 2180,125 2205,150 2261.72,150 2276.72,165 2355,165 2385,195 2395.03,205.03 v1(2395.03,274.86)
GPIO45: J2.5 U5.41 | length 546.9
  L1 w6: U5.41@2495.93,220.47 v1@2495.93,324.03
  L4 w6: J2.5 2305,105 2420,105 2495.96,180.96 v1(2495.96,324.06)
GPIO46: J2.4 U5.44 | length 340.7
  L1 w6: J2.4 2360,50 2470,160 2570,160 2595.82,185.82 U5.44
GPIO47: J2.23 U5.27 | length 1856.8
  L1 w6: v1(1874,357) 1910.03,320.97 1990.38,320.97 2023.42,354 2064,354 2076.14,366.14 U5.27
  L4 w6: J2.23 525,125 856.28,125 859.97,124.82 868.25,124.82 871.02,127.59 891.43,148 963.15,148 1075.15,260 1375,260 1488,373 1536.18,373 1547.18,384 1854,384 1867,371 1867,367.79 1874,360.79 v1(1874,357)
GPIO48: J2.22 U5.30 | length 1778.8
  L1 w6: v1(1840,357) 1840,325 1930,235 2025,235 2055.75,265.75 U5.30
  L4 w6: J2.22 605,105 848,105 871.94,104.47 876.19,104.47 899.72,128 971.43,128 1078.43,235 1395,235 1513,353 1544.47,353 1548.47,357 v1(1840,357)
NetC11_1: C11.1 D1.K L1.1 U2.6 | length 717.8
  L1 w6: 660.82,168.82 718.15,168.82 774.34,225 876,225 878,223
  L1 w15: D1.K 583.5,244.76 C11.1 677.87,244.76 678.25,245.14 678.25,246.15 687.03,254.94 U2.6@726.48,254.94
  L1 w20: D1.K 570,215.51 616.7,168.82 660.82,168.82 ; 878,223 878.24,222.76 993.64,222.76 1017.1,246.22 L1.1
NetC11_2: C11.2 U2.1 | length 174.6
  L1 w6: C11.2 736.29,215.24 773.74,252.69 U2.1@829.12,252.69
NetD7_2: D7.2 R15.1 | length 88.6
  L1 w6: D7.2 1737.33,772.6 1743.19,778.46 1743.19,800.93 1750.56,808.3 1768.54,808.3 R15.1
NetD8_2: D8.2 R14.1 | length 65.2
  L1 w15: D8.2 1711.81,225.59 1728.28,225.59 1739.11,214.76 R14.1
NetJ3_A5: J3.A5 R10.2 | length 244.3
  L1 w6: J3.A5 248.5,830 275.21,830 289.21,844 v1(293,844) ; v1(427,888) 429.68,885.32 440.51,885.32 453.19,872.64 457.13,872.64 R10.2
  L4 w6: v1(293,844) 337,888 v1(427,888)
NetJ3_B5: J3.B5 R9.2 | length 311.4
  L1 w6: J3.B5 313.06,711.02 334.89,689.19 410.48,689.19 431.18,709.89 431.18,788.91 437.04,794.76 R9.2
NetJ6_A5: J6.A5 R13.2 | length 270.3
  L1 w6: J6.A5 v1(294.96,269.29) ; R13.2 486.76,259.76 v1(487,260)
  L4 w6: v1(294.96,269.29) 473.92,269.29 483.21,260 v1(487,260)
NetJ6_B5: J6.B5 R12.2 | length 280.1
  L1 w6: J6.B5 v1(285.28,151.18) ; R12.2 485.24,189.76 v1(485.62,189.38) v1@486,189
  L4 w6: v1(285.28,151.18) 447.42,151.18 v1(485.62,189.38)
NetQ1_1: Q1.1 R21.1 | length 116.3
  L1 w6: R21.1 1036.41,626.64 1053.7,626.64 1062.49,635.43 1062.49,652.49 1093.24,683.24 Q1.1
NetQ2_1: Q2.1 R22.1 | length 63.4
  L1 w6: R22.1 1076.82,864.76 1089.3,852.28 Q2.1
NetR6_2: R6.2 U1.22 | length 210.3
  L1 w6: U1.22 739.53,659.86 745.39,654 780.14,654 786,648.14 786,571.91 815,542.91 833.39,542.91 R6.2
NetR27_1: R27.1 R29.2 U2.4 | length 187
  L1 w15: R27.1 679.76,403.94 680.14,404.31 684.39,404.31 696.89,416.81 751.21,416.81 760,408.02 760,354.96 735.1,330.06 735.1,329.74 732.76,327.4 U2.4
NetR28_1: R28.1 R30.2 U2.3 | length 328.4
  L1 w6: U2.3 803.6,327.4 786,345 786,414.37 804.1,432.47 R28.1 R30.2
"RTS FTDI": Q1.2 R22.2 U1.32 | length 719.9
  L1 w6: U1.32 U1.32@800.26,838.01 ; U1.32@800.26,839.37 864.75,839.37 870.61,833.51 870.61,790.48 912.09,749 934,749 945,738 1027.67,738 1033.53,743.86 1033.53,762.74 1020,776.27 1020,824.96 1030.28,835.24 1061.51,835.24 1082.3,814.44 1117.28,814.44 1129,802.72 1129,638.57 1123.14,632.72 Q1.2
"RXD FTDI": R18.2 U1.2 | length 1753.4
  L1 w6: v1(745.13,887.65) 745.13,884.09 757.22,872 758.31,870.91 758.31,860.28 U1.2 ; v1(1792,538) 1793,537 1793,308.54 1951.54,150 R18.2
  L4 w6: v1(745.13,887.65) 760.77,872 797.77,835 813,835 1025,835 1045,815 1086.72,815 1256.72,645 1526.72,645 1633.72,538 v1(1792,538)
"TXD FTDI": R20.2 U1.30 | length 1736.8
  L1 w6: U1.30 799.68,799.21 813,799.21 824.75,799.21 830.61,793.36 830.61,773.92 874.17,730.35 874.17,715.83 v1(876,714) ; v1(1820,513.66) 1846,487.66 1846,449.01 1813,416.01 1813,323.72 1941.72,195 2058.94,195 2100,153.94 R20.2
  L4 w6: v1(876,714) 970,620 1519.72,620 1628.72,511 1817.34,511 v1(1820,513.66)
U0RXD: J2.6 R20.1 U5.40 | length 615.5
  L1 w6: R20.1 2129.53,89.07 2150,68.6 J2.6 ; U5.40 v1(2461.96,274.86)
  L4 w6: J2.6 2163.28,50 2218.28,105 2275,105 2295,125 2400,125 2461.96,186.96 v1(2461.96,274.86)
U0TXD: J2.7 R18.1 U5.39 | length 774.2
  L1 w6: J2.7 2054.53,54.53 R18.1 ; U5.39@2429,220.47 v1@2429,324.03
  L4 w6: J2.7 2105,105 2190,105 2210,125 2265,125 2285,145 2380,145 2429.03,194.03 v1(2429.03,324.06)
"VBUS SENSE": R7.1 R11.2 U1.11 | length 442.2
  L1 w6: v1(599,800) 599.24,799.76 606,799.76 620.39,799.76 U1.11 ; v1(813.15,595) R11.2 R7.1
  L4 w6: v1(599,800) 599,740.45 606,733.45 671.45,668 672.54,666.91 728.09,666.91 743.91,651.09 743.91,626.57 772.97,597.52 810.63,597.52 v1(813.15,595)
pads on no net: J1.24 J3.A8 J3.B8 J6.A8 J6.B8 U1.3 U1.5 U1.6 U1.7 U1.8 U1.9 U1.10 U1.12 U1.13 U1.21 U1.23 U1.25 U1.27 U1.28 U1.29 U3.1 U3.3 U4.1 U4.3

## Polygon pours and split planes (outlines as drawn)
GND on L1 "GND_L01_P012" (solid, pour order 12): 708,400 743,400 743,361 710,359 710,311 656,311 656,329 655,330 644,330 644,355 644,365.5 672.22,364.22
GND on L1 "GND_L01_P011" (solid, pour order 11): 970,278 972,280 972,373.38 984.69,389 1037.64,389 1037.64,429 1015.5,429 999,418 968,418 920,370 826,370 823,373 823,414 803,414 797,408 798,407 798,358 811,358 826,343 852,343 852,309 854,307 851,304 811,304 811,277 811,272 820,272 972,272 971,277 972,278
GND on L1 "GND_L01_P010" (solid, pour order 10): 2266,626 2525,626 2525,373 2266,373
+5V_VBUS2 on L1 "+5V_VBUS2_L01_P009" (solid, pour order 9): 319,372 319,462 417,462 417,393 393,369 390,372 348,372
+5V_VBUS1 on L1 "+5V_VBUS1_L01_P007" (solid, pour order 7): 356,570 404,570 419,555 447,583 447,677 461,691 468,691 468,727 464,731 446,731 446,709 421.8,684.8 410.9,664 334.36,664 314,650 323,570
+5V on L1 "+5V_L01_P006" (solid, pour order 6): 626,492 625,491 410,491 403,484 399,477 395,473 349.91,477 331,484 322,537 348,563 395,563 416,532.23 522.01,532.23 523,518 609,518 679,518 694,518 694,473 644,473 634,473 626,473 626,489
+3V3_REG on L1 "+3V3_REG_L01_P005" (solid, pour order 5): 1119,171 1122,174 1191,174 1191,375 1200,384 1203,381 1249,381 1249,450 1241,458 1143,458 1143,396 1135,388 1134,389 1116,389 1116,175 1117,174
+3V3 on L1 "+3V3_L01_P000" (solid, pour order 0): 2509,832 2574,832 2574,874.4 2585.05,885.45 2574,899.49 2528.49,899.49 2516,887 2509,868
GND on L2 "GND_L02_P016" (solid, remove dead copper, pour order 16): 10,5 10,990 2690,990 2695,985 2689.29,979.29 2689.29,5 355,5
"+3V3 FTDI" on L2 "+3V3_FTDI_L02_P002" (solid, pour order 2): 595,590 596,589 594,587 594,568 557,568 534,591 534,635 555,656 555,720 576,720 579,717 577,715 577,713 601,713 607,707 607,692 579,692 576,689 576,637 559,620 561,618 561,598 562,598 570,590 585,590
"+3V3 FTDI" on L2 "+3V3_FTDI_L02_P003" (solid, pour order 3): 856,896 857,900 859,902 861,905 876,905 881,900 882.5,895.5 905,895 916,884 919,884 919,796 917,798 884,798 884.97,870.68 886.18,879.82 893.14,878.84 882.5,880.33 864.5,877.5 856,880.33
"+3V3 FTDI" on L2 "+3V3_FTDI_L02_P015" (solid, remove dead copper, pour order 15): 906,905 906,765 801,660 714,660 713,661 628,572 551,572 544,607 522.5,628.5 551,657 555,653 577,631 613,631 700,718 701,717 779,717 779,720 844,785 844,905
+3V3 on L2 "+3V3_L02_P014" (solid, remove dead copper, pour order 14): 1426,451 1426,565 1574,565 1576,563 1576,434 1518,434 1479,372 1449,330 1452,248 1387,183 1387,175 915,175 887.16,175 849,208 819.35,222.82 736,293 730,372 730,434 730,492 935,492 949,506 949,830 971,852 1078,852 1078,305 1339,305 1339,361 1427,449
+3V3 on L2 "+3V3_L02_P013" (solid, remove dead copper, pour order 13): 2692,7 2686.06,251.02 1928.33,253.2 1944.19,545.94 1923.5,638.65 1944.19,722.7 2003.44,718.59 2124.79,710.17 2125.27,646.26 2685.82,646.26 2693,992 1694,992 1695,991 1695,230 1813,112 2562,112 2598,76 2598,3 2683,3
GND on L3 (split plane): 2699.95,0.05 0.05,0.05 0.05,999.95 2699.95,999.95

## Keep-outs
Keep-Out Layer:
  the board outline again, w1

## Silkscreen, mask and mechanical layers (free items; w line width, h text height)
Top Overlay:
  lines w6: 1250,104 1250,115 ; 1250,886 1250,897 ; 1737,891 1737,900 ; 2250,104 2250,115 ; 2250,890 2250,901
  lines w7.87: 326,127 329,127 ; 751,104 751,115 ; 1751,103 1751,114
  lines w15.75: 1692,164 1728,164
  text "USER" at 1749,844 h40
  text "J1" at 2340,842 h40
  text "BOOT" at 1589,695 h40
  text "USB1" at 452,668 h35 r270
  text "3V3" at 1509,574 h40
  text "REG" at 1245,573 h40
  text "UART" at 131,519 h40
  text "+5V" at 444,505 h35
  text "USB2" at 451,485 h35 r270
  text "ESP" at 157,438.36 h40
  text "RESET" at 1305,371 h40
  text "POWER" at 1755,256 h40
  text "J2" at 2325,121 h40
Bottom Overlay:
  text "NC" at 369,870 h40 r90
  text "GND" at 469,870 h40 r90
  text "5V" at 569,870 h40 r90
  text "IO18" at 669,870 h40 r90
  text "IO17" at 769,870 h40 r90
  text "IO16" at 869,870 h40 r90
  text "IO15" at 969,870 h40 r90
  text "IO14" at 1069,870 h40 r90
  text "IO13" at 1169,870 h40 r90
  text "1O12" at 1269,870 h40 r90
  text "IO11" at 1369,870 h40 r90
  text "IO10" at 1469,870 h40 r90
  text "IO9" at 1569,870 h40 r90
  text "IO8" at 1669,870 h40 r90
  text "IO7" at 1769,870 h40 r90
  text "IO6" at 1869,870 h40 r90
  text "IO5" at 1969,870 h40 r90
  text "IO4" at 2069,870 h40 r90
  text "IO3" at 2169,870 h40 r90
  text "IO2" at 2269,870 h40 r90
  text "IO1" at 2369,870 h40 r90
  text "IO0" at 2469,870 h40 r90
  text "3V3" at 2569,870 h40 r90
  text "GND" at 2669,870 h40 r90
  text "<--PIN1-->" at 2683,689 h40 r90
  text "(C)AQUAPHOTON" at 1523,584 h40
  text "YASMEEN ASHRAF" at 1541,313 h40
  text "USB-" at 673,273 h40 r90
  text "USB+" at 775,272 h40 r90
  text "GND" at 375,267 h40 r90
  text "IO47" at 475,267 h40 r90
  text "IO48" at 575,267 h40 r90
  text "IO21" at 875,267 h40 r90
  text "IO26" at 975,267 h40 r90
  text "IO33" at 1075,267 h40 r90
  text "IO34" at 1175,267 h40 r90
  text "IO35" at 1275,267 h40 r90
  text "IO36" at 1375,267 h40 r90
  text "IO37" at 1475,267 h40 r90
  text "IO38" at 1575,267 h40 r90
  text "IO39" at 1675,267 h40 r90
  text "IO40" at 1775,267 h40 r90
  text "IO41" at 1875,267 h40 r90
  text "IO42" at 1975,267 h40 r90
  text "TXD" at 2075,267 h40 r90
  text "RXD" at 2175,267 h40 r90
  text "IO45" at 2275,267 h40 r90
  text "IO46" at 2375,267 h40 r90
  text "EN" at 2475,267 h40 r90
  text "GND" at 2575,267 h40 r90
  text "3V3" at 2675,267 h40 r90
Mechanical 1:
  the board outline again, w20
Top Designator:
  text "J6" at 2393,845 h40
  text "J6" at 2240,844 h40
  text "J6" at 2321,844 h40
  text "U1" at 811,741 h40
  text "SW2" at 1367,584 h40
  text "R23R25" at 1863,544 h38
  text "J3" at 17,518 h40
  text "J5" at 1542,484 h40
  text "J4" at 427,445 h40
  text "J6" at 18,435 h40
  text "R24R26" at 1849,381 h40
  text "SW1" at 1362,371 h40
  text "R16" at 1583,345 h40
  text "D8" at 1673,260 h40
  text "R14" at 1810,183 h40
  text "U5" at 2312,141 h40
  text "C15" at 1581,136 h40
  text "C5" at 2538,129 h40
  text "R18" at 1898,126 h40
  text "R20" at 2154,126 h40
  text "D1" at 531,118 h40
  text "L1" at 1040,116 h40

## Text inside footprints (layer, text, board x,y; h text height)
J1: Bottom Overlay "1" at 2634,1023 h40 r270
J2: Bottom Overlay "1" at 2631,-34 h40 r270